# Altium PCB Placa.PcbDoc
Units mm, origin at the board's own origin, x right, y up, seen from the top; angles counter-clockwise.
Board outline 83.82 x 50 mm, 2 copper layers (Top Layer, Bottom Layer); 35 components, 22 nets, 78 pads, 12 vias.
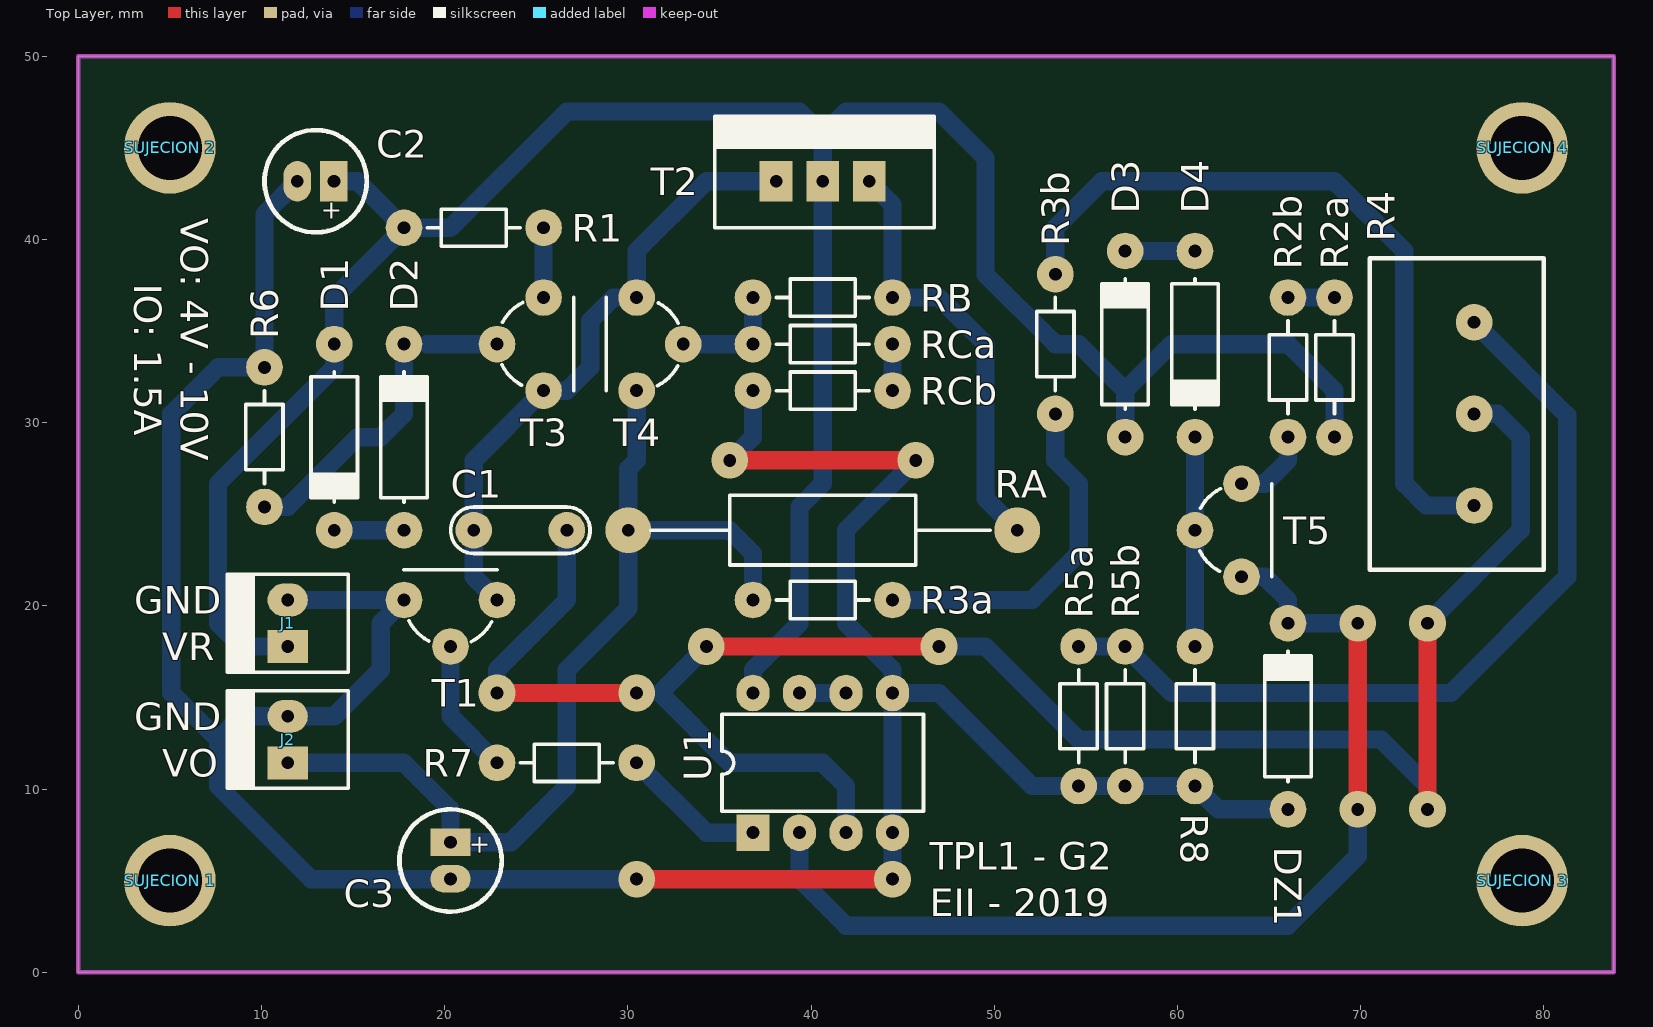
[diagram p0: Top Layer view]
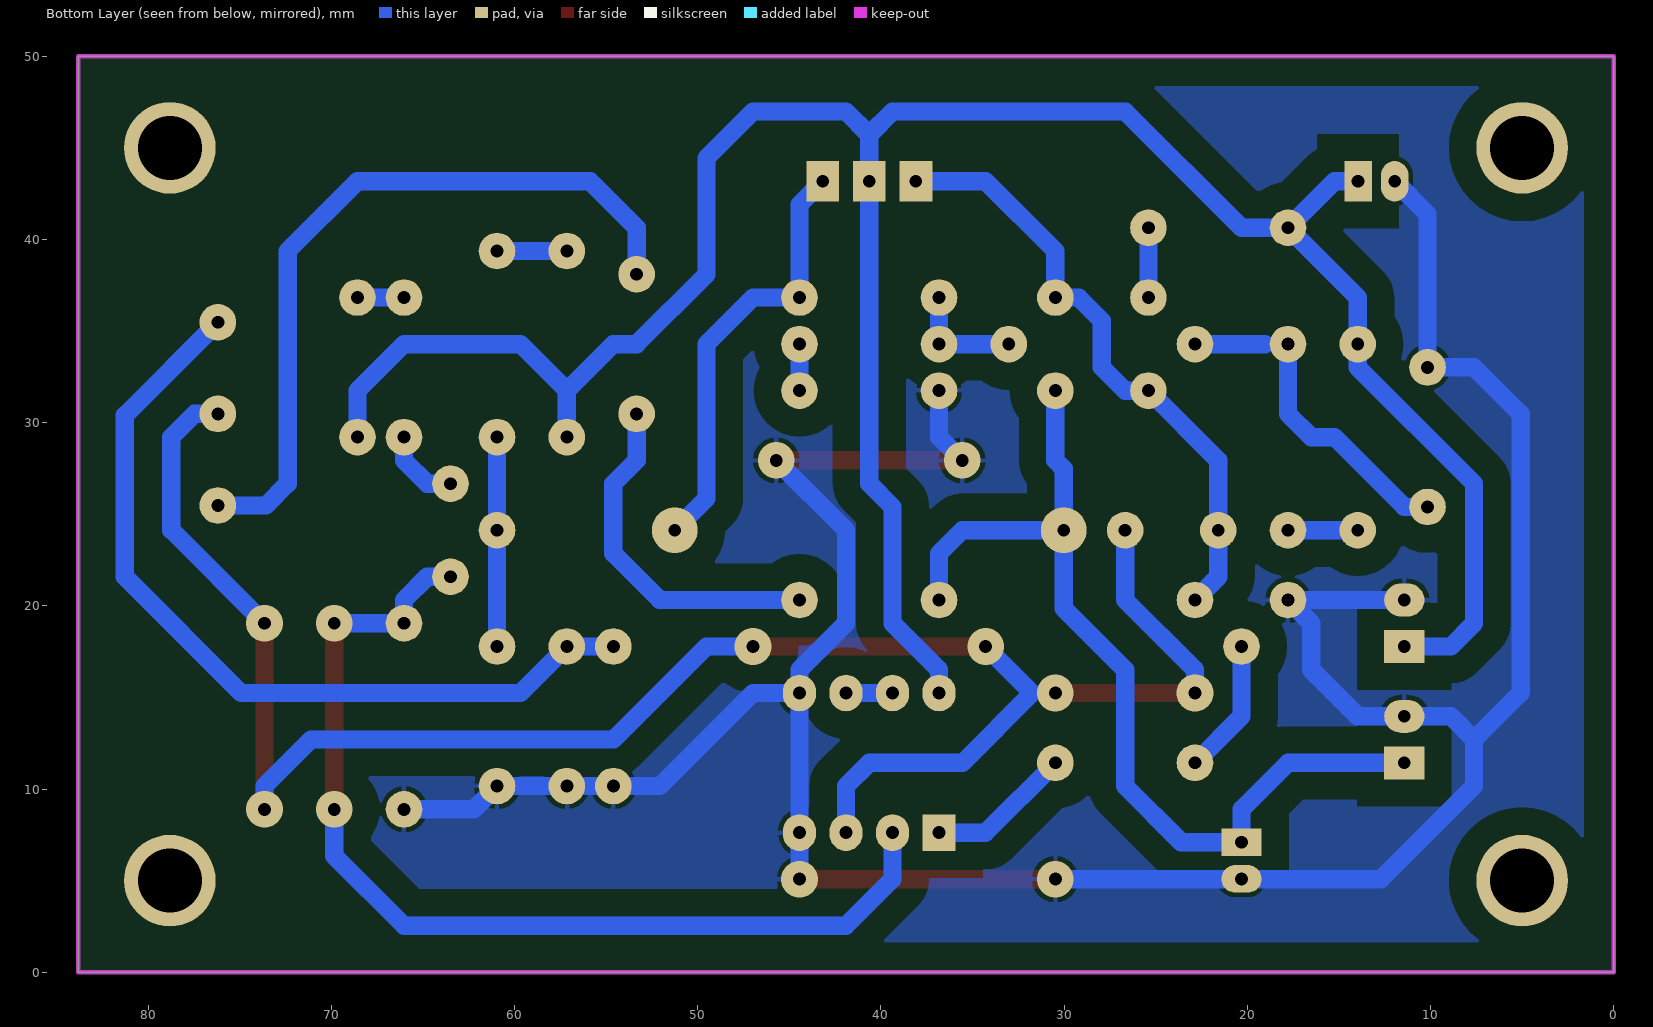
[diagram p1: Bottom Layer view, seen from below]
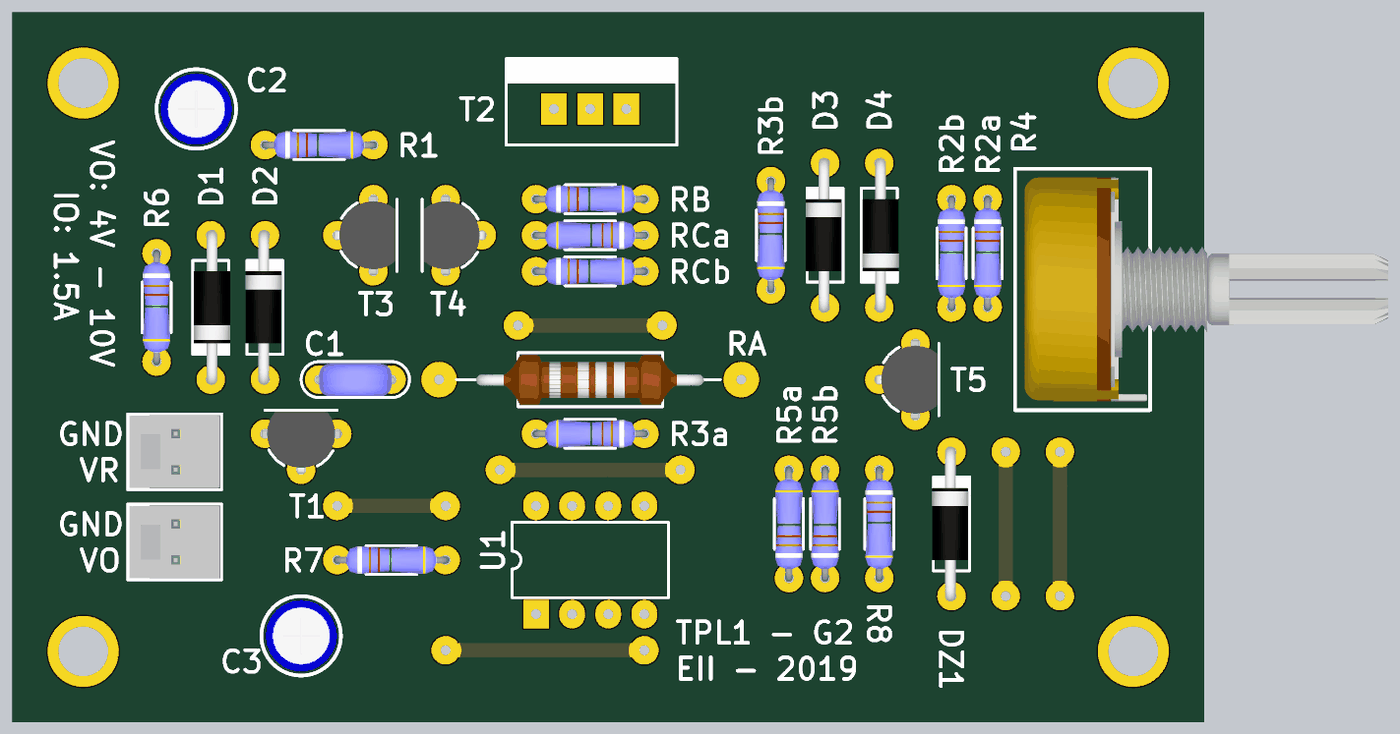
[diagram p2: 3D render of the assembled board from above, using the file's embedded part models]

## Layer stack, top to bottom
Top Solder: solder mask 0.0102, Solder Resist, Dk 3.5
Top Layer: signal copper 0.0356
Dielectric 1: dielectric 0.32, FR-4, Dk 4.8
Bottom Layer: signal copper 0.0356
Bottom Solder: solder mask 0.0102, Solder Resist, Dk 3.5

## Board outline
0,0 0,50 83.82,50 83.82,0

## Design rules (kind name [scope] priority, off if disabled: settings)
Clearance [All] p1: gap=0.7
PolygonConnect [All] p1: connectstyle=Relief reliefconductorwidth=0.254 reliefentries=4 polygonreliefangle="90 Angle" airgapwidth=0.254
RoutingVias [All] p1: holewidth=0.7 width=2 viastyle="Through Hole" minholewidth=0.7 minwidth=2 maxholewidth=0.7 maxwidth=2
SolderMaskExpansion [All] p1: expansion=0.102
Width [All] p1: maxlimit=1 minlimit=0.6 preferedwidth=1
30 further rules are at their usual default settings.

## Components (designator, comment, footprint, x,y, rotation, side; value= is the part's Value field where it differs from the comment)
C1 "1u" CAP200 24.13,24.13 r0 top
C2 "10u" CAP100RP 12.954,43.18 r180 top
C3 "10u" CAP100RP 20.32,6.096 r270 top
D1 "1N4148" DO41 13.97,29.21 r270 top
D2 "1N4148" DO41 17.78,29.21 r90 top
D3 "1N4148" DO41 57.15,34.29 r90 top
D4 "1N4148" DO41 60.96,34.29 r270 top
DZ1 "1N5223" DO41 66.04,13.97 r90 top
J1 "VR" MOLEX2 11.43,17.78 r90 top
J2 "OUT" MOLEX2 11.43,11.43 r90 top
R1 "220" RES300 17.78,40.64 r0 top
R2a "120" RES300 68.58,36.83 r270 top
R2b "X" RES300 66.04,36.83 r270 top
R3a "330" RES300 44.45,20.32 r180 top
R3b "6K8" RES300 53.34,38.1 r270 top
R4 "10K" POTENCIOMETRO 76.2,30.48 r90 top
R5a "12K" RES300 54.61,10.16 r90 top
R5b "12K" RES300 57.15,10.16 r90 top
R6 "2K7" RES300 10.16,33.02 r270 top
R7 "100K" RES300 22.86,11.43 r0 top
R8 "2K7" RES300 60.96,17.78 r270 top
RA "1" RES600 48.26,24.13 r180 top
RB "1K" RES300 36.83,36.83 r0 top
RCa "10K" RES300 44.45,34.29 r180 top
RCb "1K" RES300 36.83,31.75 r0 top
"SUJECION 1" "SUJECION" "SUJECION (5.00MM - 3.50MM)" 5,5 r90 top
"SUJECION 2" "SUJECION" "SUJECION (5.00MM - 3.50MM)" 5,45 r90 top
"SUJECION 3" "SUJECION" "SUJECION (5.00MM - 3.50MM)" 78.82,5 r90 top
"SUJECION 4" "SUJECION" "SUJECION (5.00MM - 3.50MM)" 78.82,45 r90 top
T1 "BC547C" TO92 20.32,19.05 r0 top
T2 "TIP112" "TO-220 V" 40.64,43.18 r0 top
T3 "BC327" TO92 24.13,34.29 r270 top
T4 "BC337" TO92 31.75,34.29 r90 top
T5 "BC327" TO92 62.23,24.13 r270 top
U1 "LM358AP" P008 40.64,11.43 r0 top

## Footprints (in the part's own frame and the unit in brackets; to place one, negate y for a bottom-side part, rotate by r counter-clockwise, add the part's x,y. Pads: shape width x height; smd on the part's side, far side on the other; paste and mask are expansions set on the pad)
CAP100RP [mm] "Body diameter 5mm"
  rect 1.5x2.2 hole 0.7: 1(-1,0)
  oval 1.5x2.2 hole 0.7: 2(1,0)
  silkscreen extent -2.79,-2.79 2.79,2.79, body extent -2.53,-2.51 2.53,2.54, height 11.53
CAP200 [mm]
  round 2 hole 0.7: 1(-2.54,0) 2(2.54,0)
  silkscreen extent -3.81,-1.27 3.81,1.27, body extent -2.79,-1.17 2.79,1.12, height 6.24
DO41 [mm]
  round 2 hole 0.7: 1(-5.08,0) 2(5.08,0)
  silkscreen extent -3.56,-1.27 3.56,1.27, body extent -5.46,-1.19 5.46,1.37, height 2.03
MOLEX2 [mm]
  rect 1.8x2.2 hole 0.7: 1(0,0)
  oval 1.8x2.2 hole 0.7: 2(2.54,0)
  silkscreen extent -1.4,-3.3 3.94,3.3, body extent -1.27,-3.17 3.81,3.18, height 10.74
P008 [mm] "DIP; 8 Leads; Row Spacing 7.62 mm; Pitch 2.54 mm"
  rect 1.8x2 hole 0.7: 1(-3.81,-3.81)
  oval 1.8x2 hole 0.7: 2(-1.27,-3.81) 3(1.27,-3.81) 4(3.81,-3.81) 5(3.81,3.81) 6(1.27,3.81) 7(-1.27,3.81) 8(-3.81,3.81)
  silkscreen extent -5.5,-2.65 5.5,2.65
POTENCIOMETRO [mm]
  round 2 hole 0.7: 1(-5,0) 2(0,0) 3(5,0)
  silkscreen extent -8.5,-3.8 8.5,5.7, body extent -7.87,-20.53 7.87,5.03, height 20.12
RES300 [mm]
  round 2 hole 0.7: 1(0,0) 2(7.62,0)
  silkscreen extent 1.27,-1.02 6.35,1.02, body extent -0.25,-0.97 7.87,0.97, height 2.01
RES600 [mm]
  round 2.5 hole 0.7: 1(-3,0) 2(18.24,0)
  silkscreen extent 1.27,-1.9 13.97,1.91, body extent -0.4,-1.72 15.64,1.78, height 3.59
"SUJECION (5.00MM - 3.50MM)" [mm]
  round 5 hole 3.5: 1(0,0)
TO92 [mm]
  round 2 hole 0.7: 1(0,-1.27) 2(2.54,1.27) 3(-2.54,1.27)
  silkscreen extent -2.54,-1 2.54,2.92, body extent -2.79,-1.55 2.79,2.79, height 8
"TO-220 V" [mm]
  rect 1.8x2.2 hole 0.7: 1(-2.54,0) 2(0,0) 3(2.54,0)
  silkscreen extent -5.9,-2.54 6.1,3.54, body extent -5,-2 5,3, height 18

## Part data
C1: library part CAP
C2 C3: library part CAPPOL
D1 D2 D3 D4: library part "DIODO SCHOTTKY"
DZ1: library part "DIODO ZENER"
J1 J2: library part MOLEX2
R1 R2a R2b R3a R3b R5a R5b R6 R7 R8 RA RB RCa RCb: library part RES
R4: library part POTENCIOMETRO
T1 T2 T4: library part "TRANSISTOR NPN"
T3 T5: library part "TRANSISTOR PNP"
U1: "Dual Operational Amplifier"

## Via types
v1: diameter 2, hole 0.7, Top Layer to Bottom Layer, 12 vias

## Nets (pads, with @x,y where several pads share a name; then routed paths per layer and width w, separated by ;. In a path a pad name is that pad's centre, name@x,y a point inside that pad or via, vN(x,y) a via of type N, cw(c..) or ccw(c..) an arc to the next point about the centre after c; other vN are vias at no path point)
GND: C2.2 C3.2 DZ1.1 J1.2 J2.2 R5a.1 R5b.1 R6.1 R8.2 RCb.1 T1.3 U1.4 U1.5 | length 162.7
  Top Layer w1: v1(30.48,5.08) v1(44.45,5.08) ; v1(35.56,27.94) v1(45.72,27.94)
  Bottom Layer w1: J1.2 T1.3 16.51,19.05 16.51,16.51 13.97,13.97 J2.2 8.89,13.97 7.62,12.7 ; C2.2 10.16,41.386 R6.1 7.62,33.02 5.08,30.48 5.08,15.24 7.62,12.7 ; v1(30.48,5.08) 12.7,5.08 7.62,10.16 7.62,12.7 ; v1(35.56,27.94) 36.83,29.21 RCb.1 ; v1(44.45,5.08) U1.4 U1.5 ; v1(45.72,27.94) 41.91,24.13 41.91,19.05 44.45,16.51 U1.5 ; DZ1.1 62.23,8.89 R8.2 R5b.1 R5a.1 52.07,10.16 46.99,15.24 U1.5
NetC1_1: C1.1 T1.2 T2.1 T3.2 T4.2 | length 33.9
  Bottom Layer w1: T1.2 21.59,21.59 C1.1 21.59,27.94 T3.2 26.67,31.75 27.94,33.02 27.94,35.56 29.21,36.83 T4.2 30.48,39.37 34.29,43.18 T2.1
NetC1_2: C1.2 R4.2 U1.3 | length 105.8
  Top Layer w1: v1(22.86,15.24) v1(30.48,15.24) ; v1(34.29,17.78) v1(46.99,17.78) ; v1(73.66,8.89) v1(73.66,19.05)
  Bottom Layer w1: v1(22.86,15.24) 22.86,16.51 26.67,20.32 C1.2 ; v1(34.29,17.78) 31.75,15.24 35.56,11.43 40.64,11.43 41.91,10.16 U1.3 ; v1(46.99,17.78) 49.53,17.78 54.61,12.7 71.12,12.7 73.66,10.16 v1(73.66,8.89) ; v1(73.66,19.05) 78.74,24.13 78.74,29.21 77.47,30.48 R4.2
NetD1_2: D1.2 D2.1 | length 3.8
  Bottom Layer w1: D1.2 D2.1
NetD2_2: D2.2 R6.2 T3.1 | length 17.3
  Bottom Layer w1: R6.2 11.43,25.4 15.24,29.21 16.51,29.21 17.78,30.48 D2.2 ; 19.05,34.29 T3.1
NetD3_2: D3.2 D4.1 | length 3.8
  Bottom Layer w1: D3.2 D4.1
NetD4_2: D4.2 R8.1 T5.1 | length 11.4
  Bottom Layer w1: R8.1 T5.1 D4.2
NetR1_2: R1.2 T3.3 | length 3.8
  Bottom Layer w1: T3.3 R1.2
NetR2a_1: R2a.1 R2b.1 | length 2.5
  Bottom Layer w1: R2b.1 R2a.1
NetR2b_2: R2b.2 T5.3 | length 4.3
  Bottom Layer w1: T5.3 64.77,26.67 66.04,27.94 R2b.2
NetR3a_1: R3a.1 R3b.2 | length 19.4
  Bottom Layer w1: R3a.1 52.07,20.32 54.61,22.86 54.61,26.67 53.34,27.94 R3b.2
NetR3b_1: R3b.1 R4.1 | length 41.2
  Bottom Layer w1: R3b.1 53.34,40.64 55.88,43.18 68.58,43.18 72.39,39.37 72.39,26.67 73.58,25.48 R4.1
NetR4_3: R4.3 R5a.2 R5b.2 | length 46.3
  Bottom Layer w1: R5a.2 R5b.2 59.69,15.24 74.93,15.24 81.28,21.59 81.28,30.4 R4.3
NetR7_1: R7.1 T1.1 | length 7.4
  Bottom Layer w1: T1.1 20.32,13.97 R7.1
NetR7_2: R7.2 U1.1 | length 7.9
  Bottom Layer w1: R7.2 34.29,7.62 U1.1
NetRA_1: RA.1 RB.2 T2.3 | length 23.9
  Bottom Layer w1: T2.3 44.45,41.91 RB.2 46.99,36.83 49.53,34.29 49.53,25.86 RA.1
NetRB_1: RB.1 RCa.2 T4.1 | length 6.3
  Bottom Layer w1: T4.1 RCa.2 RB.1
NetRCa_1: RCa.1 RCb.2 | length 2.5
  Bottom Layer w1: RCb.2 RCa.1
NetU1_6: U1.6 U1.7 | length 2.5
  Bottom Layer w1: U1.7 U1.6
VG: DZ1.2 T5.2 U1.2 | length 56.5
  Top Layer w1: v1(69.85,8.89) v1(69.85,19.05)
  Bottom Layer w1: U1.2 39.37,5.08 41.91,2.54 66.04,2.54 69.85,6.35 v1(69.85,8.89) ; T5.2 64.77,21.59 66.04,20.32 DZ1.2 v1(69.85,19.05)
VO: C3.1 J2.1 R3a.2 RA.2 T4.3 | length 52.4
  Bottom Layer w1: J2.1 17.78,11.43 20.32,8.89 C3.1 23.606,7.096 26.67,10.16 26.67,16.51 30.02,19.86 RA.2 ; T4.3 30.48,27.94 30.02,27.48 RA.2 ; R3a.2 36.83,22.86 35.56,24.13 RA.2
VR: C2.1 D1.1 D3.1 J1.1 R1.1 R2a.2 T2.2 U1.8 | length 138.8
  Bottom Layer w1: J1.1 8.89,17.78 7.62,19.05 7.62,26.67 13.97,33.02 D1.1 13.97,36.83 R1.1 ; C2.1 15.24,43.18 R1.1 ; U1.8 36.83,16.51 39.37,19.05 39.37,25.4 40.64,26.67 T2.2 40.64,45.72 ; D3.1 57.15,31.75 ; R2a.2 68.58,31.75 66.04,34.29 59.69,34.29 57.15,31.75 ; R1.1 20.32,40.64 26.67,46.99 39.37,46.99 40.64,45.72 ; 40.64,45.72 41.91,46.99 46.99,46.99 49.53,44.45 49.53,38.1 53.34,34.29 54.61,34.29 57.15,31.75
pads on no net: "SUJECION 1.1" "SUJECION 2.1" "SUJECION 3.1" "SUJECION 4.1"

## Polygon pours and split planes (outlines as drawn)
GND on Bottom Layer "Top Overlay-No Net" (solid, remove dead copper, pour order 2): 0,50 83.82,50 83.82,0 0,0

## Keep-outs
Keep-Out Layer:
  the board outline again, w0.254

## Silkscreen, mask and mechanical layers (free items; w line width, h text height)
Top Overlay:
  lines w0.2: 31.242,24.13 34.29,24.13 ; 46.99,24.13 49.784,24.13
  text "VO: 4V - 10V" at 5.588,41.148 h1.52 r270
  text "IO: 1.5A" at 3.048,37.592 h1.52 r270
  text "GND" at 3.048,19.558 h1.52
  text "VR" at 4.572,17.018 h1.52
  text "GND" at 3.048,13.208 h1.52
  text "VO" at 4.572,10.668 h1.52
  text "TPL1 - G2" at 46.482,5.588 h1.52
  text "EII - 2019" at 46.482,3.048 h1.52

## Text inside footprints (layer, text, board x,y; h text height)
C2: Top Overlay "+" at 14.402,42.012 h1.02 r180
C3: Top Overlay "+" at 21.488,7.544 h1.02 r270